# Altium PCB EIS_Sensoren.PcbDoc
Units mil, origin at the board's own origin, x right, y up, seen from the top; angles counter-clockwise.
Board outline 3444.88 x 1496.06 mil, 2 copper layers (Top Layer, Bottom Layer); 43 components, 23 nets, 172 pads, 18 vias.
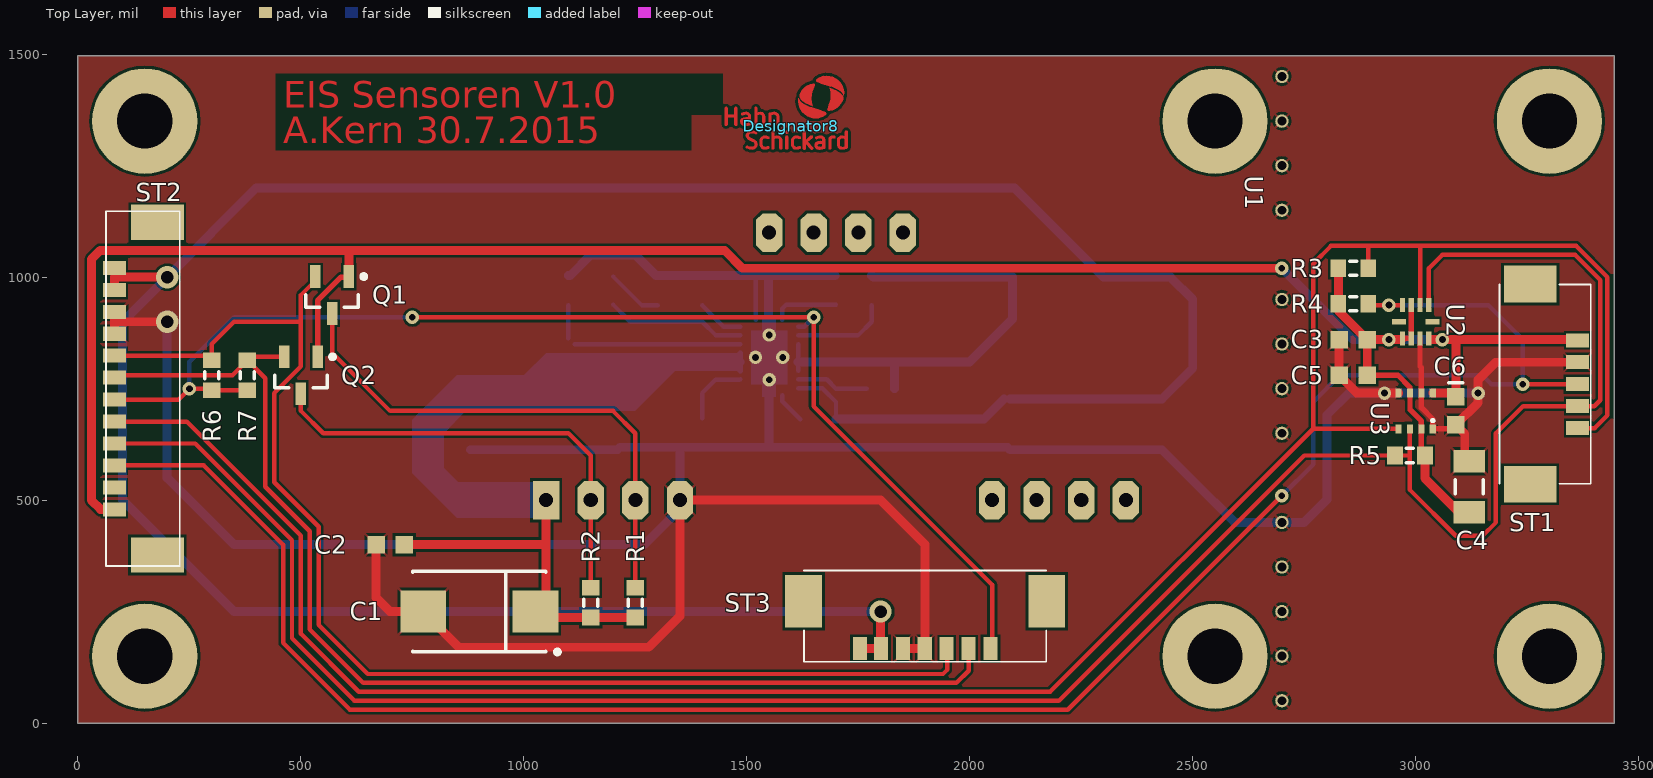
[diagram p0: Top Layer view]
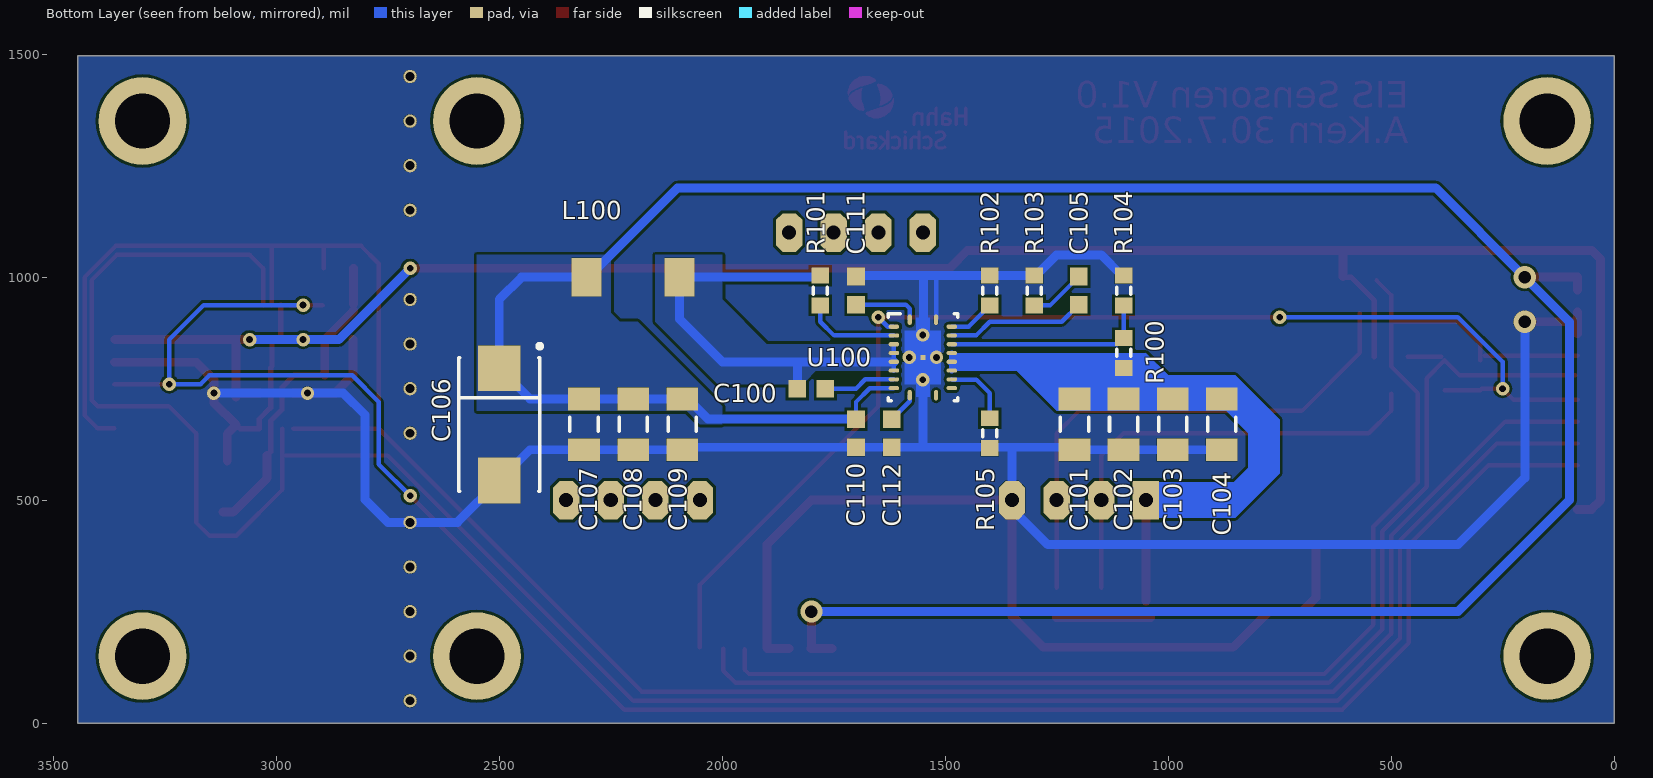
[diagram p1: Bottom Layer view, seen from below]

## Layer stack, top to bottom
Top Solder: solder mask 0.4, Solder Resist, Dk 3.5
Top Layer: signal copper 1.4
Dielectric 1: dielectric 12.6, FR-4, Dk 4.8
Bottom Layer: signal copper 1.4
Bottom Solder: solder mask 0.4, Solder Resist, Dk 3.5

## Board outline
0,0 0,1496.06 3444.88,1496.06 3444.88,0 0,0

## Design rules (kind name [scope] priority, off if disabled: settings)
Clearance Via-Trace [(IsVia) vs (IsTrack)or(isVia)] p1: gap=5.91
Clearance Via-Pad [(IsVia) vs (InPadClass('All Pads'))] p2: gap=5.91
Clearance Pad-Trace [(InPadClass('All Pads')) vs IsTrack] p3: gap=5.91
Clearance Trace-Trace [IsTrack vs IsTrack] p4: gap=5.91
Clearance [All] p5: gap=5.91
ComponentClearance [All] p1: gap=15.75 collisioncheckmode=3 verticalgap=15.75 showdistances=FALSE
DiffPairsRouting [All] p1: maxlimit=39.37 minlimit=5.91 mostfreqgap=7.87 toplayer_minwidth=5.91 toplayer_maxwidth=39.37 toplayer_prefwidth=7.87 bottomlayer_minwidth=5.91 bottomlayer_maxwidth=39.37 bottomlayer_prefwidth=7.87 maxuncoupledlength=500
FabricationTestPointUsage TestPointUsage [All] p1: valid=0 allowmultiple=FALSE
FabricationTestpoint Testpoint [(IsPad And (OnTopLayer Or OnBottomLayer))] p1: side=3 testpointundercomponent=TRUE minsize=31.5 maxsize=47.24 preferedsize=39.37 minholesize=0 maxholesize=0 preferedholesize=0 testpointgrid=3.94 allowsidetop=TRUE allowsidebottom=TRUE usegrid=TRUE gridtolerance=0.01
Height [All] p1: minheight=0 maxheight=610.24 prefheight=393.7
HoleSize [All] p1: absolutevalues=TRUE maxlimit=220 minlimit=12 maxpercent=80.000 minpercent=20.000
MinimumSolderMaskSliver [All] p1: minsoldermaskwidth=7
PlaneClearance [All] p1: clearance=5.91
PlaneConnect [All] p1: planeconnectstyle=Relief reliefexpansion=19.68 reliefentries=4 reliefconductorwidth=19.68 reliefairgap=7.87
PolygonConnect PolygonConnect_1 [All vs OnLayer('Bottom Layer')] p1: connectstyle=Relief reliefconductorwidth=0 reliefentries=4 polygonreliefangle="90 Angle" airgapwidth=0
PolygonConnect VIA [All vs ISVIA] p2: connectstyle=Direct reliefconductorwidth=10 reliefentries=4 polygonreliefangle="90 Angle" airgapwidth=10
PolygonConnect [All] p3: connectstyle=Relief reliefconductorwidth=5.91 reliefentries=4 polygonreliefangle="45 Angle" airgapwidth=5.91
RoutingCorners [All] p1: cornerstyle=45-Degree minsetback=19.68 maxsetback=39.37
RoutingVias [All] p1: holewidth=12 width=24 viastyle="Through Hole" minholewidth=12 minwidth=24 maxholewidth=16 maxwidth=40
SilkToSolderMaskClearance SilkscreenOverComponentPads [IsPad] p1: minsilkscreentomaskgap=10 clearancetoexposedcopper=TRUE
SolderMaskExpansion [All] p1: expansion=0
Width Width_VCC [(InNet('6V') OR InNet('A3V') OR InNet('UBAT'))] p1: maxlimit=50 minlimit=10 preferedwidth=20
Width Width_GND [(InNet('AGND') OR InNet('GND'))] p2: maxlimit=50 minlimit=10 preferedwidth=20
Width [All] p3: maxlimit=20 minlimit=6 preferedwidth=10
19 further rules are at their usual default settings.

## Classes and differential pairs
component class EIS_Sensoren: C1 C2 C3 C4 C6 Q1 Q2 R1 R2 R3 R4 R5 R6 R7 ST1 ST2 ST3 U1 U2 U3
component class Designator: C100 C101 C102 C103 C104 C105 C106 C107 C108 C109 C110 C111 C112 L100 R100 R101 R102 R103 R104 R105 U100

## Components (designator, comment, footprint, x,y, rotation, side; value= is the part's Value field where it differs from the comment)
C1 "220uF / 10V" D 900,250 r180 top
C2 "100nF" CAPC1608N 700,400 r180 top
C3 "100nF" CAPC1608N 2860,860 r180 top
C4 "1uF" CAPC3216N 3120,530 r90 top
C5 "100nF" CAPC1608N 2860,780 r180 top
C6 "100nF" CAPC1608N 3090,700 r270 top
C100 "100nF" CAPC1608N 1800,750 r180 bottom
C101 "1uF" CAPC3216N 1210,670 r270 bottom
C102 "10uF" CAPC3216N 1100,670 r270 bottom
C103 "10uF" CAPC3216N 990,670 r270 bottom
C104 "10uF" CAPC3216N 880,670 r270 bottom
C105 "10nF" CAPC1608N 1200,970 r270 bottom
C106 "220uF / 10V" D 2500,670 r270 bottom
C107 "10uF" CAPC3216N 2310,670 r270 bottom
C108 "10uF" CAPC3216N 2200,670 r270 bottom
C109 "10uF" CAPC3216N 2090,670 r270 bottom
C110 "100nF" CAPC1608N 1700,650 r90 bottom
C111 "100nF" CAPC1608N 1700,970 r270 bottom
C112 "47nF" CAPC1608N 1620,650 r90 bottom
Designator8 "Comment" Hahn-Schickard-LOGO_KLEIN 1600,1340 r0 top
L100 "CLF6045T-2R2N" CLF6045 2200,1000 r180 bottom
Q1 "BSS123" SOT23_N 570,960 r270 top
Q2 "BSS123" SOT23_N 500,780 r270 top
R1 "100k" RESC1608N 1250,270 r270 top
R2 "100k" RESC1608N 1150,270 r270 top
R3 "4,7k" RESC1608N 2860,1020 r180 top
R4 "4,7k" RESC1608N 2860,940 r180 top
R5 "4,7k" RESC1608N 2987.2,600 r0 top
R6 "100k" RESC1608N 300,780 r90 top
R7 "100k" RESC1608N 380,780 r90 top
R100 "3.9meg" RESC1608N 1100,830 r90 bottom
R101 "150k" RESC1608N 1780,970 r90 bottom
R102 "330k" RESC1608N 1400,970 r90 bottom
R103 "3.9k" RESC1608N 1300,970 r90 bottom
R104 "100k" RESC1608N 1100,970 r90 bottom
R105 "nc" RESC1608N 1400,650 r270 bottom
ST1 "Molex 533980571" "Molex 533980571" 3310,760 r90 top
ST2 "Molex 533981271" "Molex 533981271" 130,750 r270 top
ST3 "Molex 533980771" "Molex 533980771" 1900,220 r0 top
U1 "EE893-02C2" EE893 1700,800 r0 top
U2 "Si1132" Si1132 3000,900 r270 top
U3 "BME280" BME280 3000,700 r270 top
U100 "TPS61088" RHL0020A 1550,820 r180 bottom

## Footprints (in the part's own frame and the unit in brackets; to place one, negate y for a bottom-side part, rotate by r counter-clockwise, add the part's x,y. Pads: shape width x height; smd on the part's side, far side on the other; paste and mask are expansions set on the pad)
BME280 [mm] "8 pin Druck/Feuchte/Temp"
  rect 0.5x0.35 smd: 1(1.025,0.975) 2(1.025,0.325) 3(1.025,-0.325) 4(1.025,-0.975) 5(-1.025,-0.975) 6(-1.025,-0.325) 7(-1.025,0.325) 8(-1.025,0.975)
  silkscreen extent 0.53,0.95 0.57,1, body extent -1.25,-1.25 1.25,1.25, height 0.94
CAPC1608N [mm] "Chip Capacitor, Body 1.6x0.8mm, IPC Medium Density"
  rect 1x1 smd: 1(-0.8,0) 2(0.8,0)
  body extent -0.87,-0.48 0.87,0.48, height 0.85
CAPC3216N [mm] "Chip Capacitor, Body 3.2x1.6mm, IPC Medium Density"
  rect 1.3x1.8 smd: 1(-1.45,0) 2(1.45,0)
  silkscreen extent -0.4,-0.8 0.4,0.8, body extent -1.7,-0.9 1.7,0.9, height 1.35
CLF6045 [mm] "TDK-Spule, 5.9x6.2x4.5mm geschirmt"
  rect 1.7x2.2 smd: 1(-2.65,0) 2(2.65,0)
  body extent -3,-3 3,3, height 4.5
D [mm] "Capacitor, SM Tantalum; Body 7.3 x 4.3 mm (LxW typ)"
  rect 2.6x2.4 smd: 1(-3.2,0) 2(3.2,0)
  silkscreen extent -4.58,-2.3 3.8,2.42
EE893 [mm] "CO2-Sensor 22x45x15.3mm"
  rect 1.5x2.2 hole 0.8: 1(-16.51,-7.62)
  oct 1.5x2.2 hole 0.8: 2(-13.97,-7.62) 3(-11.43,-7.62) 4(-8.89,-7.62) 5(8.89,-7.62) 6(11.43,-7.62) 7(13.97,-7.62) 8(16.51,-7.62) 9(3.81,7.62) 10(1.27,7.62) 11(-1.27,7.62) 12(-3.81,7.62)
  body extent -27.35,-10.9 22.55,11.1, height 15.25
Hahn-Schickard-LOGO_KLEIN [mil]
  Top Layer region: 25.83,54.25 32.18,50.1 39.73,46.44 47.59,43.48 45.3,52.73 45.29,52.75 45.29,52.77 45.29,52.77 44.69,61.49 44.69,61.52 44.69,61.54 44.69,61.54 45.43,69.25 45.43,69.26 45.43,69.28 45.43,69.28 45.43,69.28 47.02,75.97 47.02,75.97 47.02,75.97 47.02,75.97 47.03,75.98 47.03,75.99 47.03,75.99 47.03,76 49.08,81.9 49.08,81.9 49.08,81.91 49.08,81.91 49.09,81.91 49.09,81.91 49.09,81.91 49.09,81.92 50.99,86.69 52.18,90.31 52.32,91.35 52.27,92.2 52.01,92.88 51.51,93.41 50.71,93.81 49.56,94.06 48.31,94.1 47.33,94 47.34,94 47.34,94.01 47.34,94.01 47.33,94 34.79,89.46 24.7,80.73 18.39,68.99 18.39,68.99 18.24,65.02 19.54,61.24 22.13,57.64
  Top Layer region: 45.42,40.64 52.38,38.46 52.38,38.46 52.38,38.46 52.38,38.46 59.91,36.2 59.92,36.19 59.92,36.19 59.92,36.19 59.92,36.19 59.92,36.19 59.92,36.19 59.92,36.19 59.91,36.2 59.92,36.19 66.25,34.2 66.25,34.2 66.26,34.19 66.26,34.19 66.25,34.2 66.26,34.19 66.26,34.19 66.26,34.19 71.33,32.38 71.34,32.38 71.35,32.38 71.35,32.38 74.28,31.1 74.29,31.09 74.31,31.08 74.31,31.08 76.46,29.82 76.48,29.81 76.5,29.8 76.5,29.8 77.5,28.96 77.52,28.94 77.54,28.91 77.54,28.91 77.54,28.92 77.54,28.91 77.54,28.91 77.54,28.91 78.17,28.06 78.17,28.05 78.18,28.05 78.18,28.05 78.17,28.05 78.2,28.02 78.22,27.97 78.22,27.97 78.48,27.09 78.49,27.05 78.49,27.01 78.49,27.01 78.49,27 78.49,26.99 78.49,26.99 78.41,26.18 78.41,26.2 78.41,26.21 78.41,26.21 78.41,26.18 78.4,26.14 78.39,26.1 78.39,26.1 78.01,25.26 77.99,25.23 77.97,25.2 77.97,25.2 77.05,24.07 77.04,24.05 77.02,24.03 77.02,24.03 77.02,24.04 77.02,24.03 77.02,24.03 77.02,24.03 75.6,22.82 75.6,22.82 75.58,22.81 75.56,22.8 75.56,22.8 75.56,22.79 75.58,22.81 75.59,22.82 75.59,22.82 75.6,22.82 75.6,22.82 75.6,22.82 75.6,22.82 75.59,22.82 75.56,22.8 75.56,22.79 75.56,22.79 75.56,22.79 69.79,19.34 69.78,19.34 69.78,19.33 69.78,19.34 69.79,19.34 69.79,19.34 69.78,19.34 69.76,19.32 69.73,19.31 69.73,19.31 61.33,16.69 61.32,16.69 61.32,16.68 61.32,16.69 61.33,16.69 61.33,16.69 61.32,16.68 61.3,16.68 61.29,16.68 61.29,16.68 41.29,18.36 24.74,29.73 16,47.8 16,47.8 16,47.8 16,47.81 16,47.81 16,47.81 16,47.82 16,47.83 15.34,53.75 15.34,53.78 15.34,53.8 15.34,53.8 15.34,53.81 15.82,61.27 15.82,61.27 15.87,61.4 15.97,61.49 16.11,61.52 16.24,61.48 16.33,61.37 16.33,61.37 16.33,61.37 16.33,61.37 17.93,58.02 21.27,53.9 30.21,47.13 40.41,42.49 40.41,42.49 40.41,42.48 40.41,42.48 40.41,42.48 40.42,42.48 40.42,42.48 40.42,42.48
  Top Layer region: 81.93,34.07 81.96,34.04 82,34.02 82,34.02 82.87,33.58 82.9,33.57 82.93,33.56 82.93,33.56 82.94,33.56 84.13,33.29 84.14,33.29 84.16,33.29 84.19,33.29 84.18,33.29 84.19,33.29 84.19,33.29 84.19,33.29 84.19,33.29 84.16,33.29 84.14,33.29 84.14,33.29 84.14,33.29 84.13,33.29 84.13,33.29 84.14,33.29 84.14,33.29 84.19,33.29 85.48,33.25 85.48,33.25 85.49,33.25 85.49,33.25 85.48,33.25 85.5,33.25 85.51,33.25 85.51,33.25 86.51,33.34 86.52,33.35 86.53,33.35 86.53,33.35 99.27,37.97 109.51,46.83 115.92,58.77 115.92,58.77 115.92,58.77 115.93,58.8 115.93,58.84 115.93,58.84 115.93,58.84 115.93,58.84 115.93,58.84 116.08,62.89 116.08,62.89 116.08,62.9 116.08,62.9 116.08,62.9 116.08,62.95 116.07,62.99 116.07,62.99 114.74,66.85 114.72,66.89 114.7,66.92 114.7,66.92 112.08,70.57 112.06,70.59 112.04,70.61 112.04,70.61 108.31,74.03 108.29,74.05 108.27,74.06 108.27,74.06 108.27,74.06 101.89,78.23 101.89,78.23 101.89,78.23 101.89,78.23 101.88,78.24 101.86,78.24 101.86,78.24 101.86,78.24 101.88,78.24 101.89,78.23 101.89,78.23 101.89,78.23 101.86,78.24 101.86,78.24 101.86,78.24 101.86,78.24 94.28,81.92 94.28,81.92 94.28,81.92 94.28,81.92 94.28,81.92 94.28,81.92 94.27,81.93 94.26,81.93 94.26,81.93 85.91,85.07 85.8,85.09 85.69,85.06 85.6,84.98 85.56,84.88 85.56,84.76 85.56,84.76 87.97,75.05 88.57,66.37 87.84,58.7 86.26,52.05 84.21,46.15 82.31,41.38 82.31,41.38 82.31,41.38 82.31,41.38 82.31,41.38 82.31,41.38 82.3,41.37 82.3,41.36 82.3,41.36 81.1,37.71 81.1,37.69 81.09,37.67 81.09,37.67 81.09,37.67 80.94,36.58 80.94,36.58 80.93,36.55 80.93,36.52 80.93,36.52 80.93,36.52 80.99,35.6 80.99,35.6 80.99,35.6 80.99,35.6 81,35.56 81.01,35.52 81.01,35.52 81.01,35.52 81.01,35.52 81.01,35.51 81.01,35.51 81.3,34.76 81.31,34.76 81.31,34.75 81.31,34.75 81.31,34.76 81.33,34.71 81.36,34.67 81.36,34.67 81.36,34.67 81.36,34.67
  Top Layer region: 93.4,85.76 103.66,81.08 112.66,74.28 112.66,74.28 112.66,74.28 116.03,70.11 117.65,66.74 118.13,74.21 117.47,80.14 117.47,80.14 108.79,98.09 92.36,109.38 72.49,111.05 72.49,111.05 72.49,111.05 88.4,87.61
  Top Layer region: 55.56,99.94 55.53,99.98 55.52,100.02 55.52,100.02 55.25,100.9 55.24,100.95 55.24,101 55.24,101 55.32,101.81 55.33,101.85 55.35,101.89 55.35,101.89 55.72,102.73 55.74,102.76 55.76,102.79 55.76,102.79 56.68,103.92 56.7,103.94 56.71,103.96 56.72,103.96 56.72,103.96 58.14,105.17 58.14,105.17 58.14,105.17 58.14,105.17 58.16,105.19 58.17,105.2 58.17,105.2 58.18,105.2 63.95,108.66 63.95,108.66 63.95,108.66 63.95,108.66 63.95,108.66 63.98,108.67 64.01,108.68 64.01,108.68 72.41,111.31 72.53,111.31 72.65,111.27 72.72,111.17 72.75,111.05 72.75,111.05 72.75,111.05 72.75,111.04 72.75,111.04 88.48,87.86 88.58,87.8 88.64,87.71 88.66,87.61 88.66,87.61 88.63,87.49 88.56,87.39 88.44,87.34 88.32,87.35 88.32,87.35 81.35,89.53 81.35,89.53 81.35,89.53 81.35,89.53 73.82,91.8 73.82,91.8 73.81,91.8 73.81,91.8 73.81,91.8 67.48,93.79 67.48,93.8 67.48,93.8 67.48,93.79 67.48,93.79 67.48,93.8 67.47,93.8 67.47,93.8 67.47,93.8 62.4,95.61 62.39,95.61 62.39,95.61 62.39,95.61 59.45,96.9 59.44,96.9 59.43,96.91 59.43,96.91 57.27,98.17 57.25,98.18 57.23,98.19 57.23,98.19 56.23,99.03 56.21,99.06 56.19,99.08 56.19,99.08 56.19,99.08 56.19,99.08 56.19,99.08 56.19,99.08
  Top Layer region: 108.46,-42.33 108.46,-34.04 108.76,-31.74 110.02,-29.79 111.98,-28.56 114.28,-28.28 114.28,-28.28 114.28,-28.28 117.02,-28.7 116.45,-23.03 113.69,-22.7 109.18,-23.43 105.39,-25.98 102.98,-29.86 102.41,-34.4 102.41,-34.4 102.41,-41.98 102.41,-41.98 103.07,-46.64 105.64,-50.58 109.62,-53.08 114.28,-53.68 114.28,-53.68 114.28,-53.68 119.63,-53.19 117.61,-47.89 114.28,-48.15 111.98,-47.84 110.02,-46.59 108.77,-44.64 108.46,-42.33
  Top Layer region: 25.76,-50.68 25.99,-51.95 26.72,-53.03 27.81,-53.73 29.09,-53.95 29.09,-53.95 30.33,-53.72 31.39,-53.02 32.1,-51.98 32.35,-50.74 32.35,-50.74 32.35,-50.71 32.34,-50.68 32.34,-50.68 32.34,-50.68 32.34,-50.68 32.34,-50.68 32.34,-50.68 32.34,-40.68 43.05,-52.8 44.17,-53.65 45.54,-53.95 45.54,-53.95 45.55,-53.95 45.55,-53.95 45.55,-53.95 45.54,-53.95 46.77,-53.72 47.81,-53.04 48.5,-52.01 48.75,-50.79 48.75,-50.79 48.75,-50.77 48.75,-50.74 48.75,-50.74 48.75,-50.74 48.75,-50.72 48.74,-50.7 48.74,-50.7 48.74,-50.69 48.54,-49.55 48.52,-49.5 48.5,-49.46 48.5,-49.46 47.94,-48.6 47.93,-48.58 47.92,-48.56 47.92,-48.56 36.87,-36.6 47.13,-28.02 47.97,-26.96 48.28,-25.64 48.28,-25.64 48.28,-25.64 48.28,-25.64 48.28,-25.64 48.28,-25.64 48.28,-25.61 48.28,-25.58 48.28,-25.58 48.03,-24.36 47.34,-23.33 46.29,-22.65 45.07,-22.43 45.07,-22.43 45.07,-22.43 45.05,-22.43 45.02,-22.44 45.02,-22.44 45.02,-22.44 45.01,-22.44 45.01,-22.44 45.02,-22.44 45.02,-22.44 45.01,-22.44 43.78,-22.71 43.78,-22.71 43.77,-22.71 43.77,-22.71 43.78,-22.71 43.73,-22.73 43.69,-22.75 43.69,-22.75 42.76,-23.35 42.74,-23.37 42.72,-23.38 42.72,-23.38 42.73,-23.38 42.72,-23.38 42.72,-23.38 42.72,-23.38 32.34,-32.46 32.34,-14.29 32.35,-14.25 32.35,-14.21 32.35,-14.21 32.1,-12.97 31.39,-11.93 30.33,-11.24 29.08,-11.02 29.08,-11.02 29.09,-11.02 29.1,-11.02 29.09,-11.02 29.08,-11.02 29.08,-11.02 29.07,-11.02 29.07,-11.02 29.08,-11.02 27.8,-11.23 26.71,-11.93 25.99,-13.01 25.76,-14.29 25.76,-14.29 25.76,-14.29 25.76,-14.29 25.76,-14.29 25.76,-14.29
  Top Layer region: 11.09,-48.15 8.73,-47.71 6.78,-46.33 5.59,-44.25 5.38,-41.86 5.38,-41.86 5.38,-41.86 5.38,-34.51 5.6,-32.14 6.8,-30.08 8.74,-28.71 11.09,-28.28 11.09,-28.28 11.09,-28.28 13.83,-28.57 15.56,-29.1 17.17,-29.81 18.5,-30.05 18.5,-30.05 19.55,-29.85 20.45,-29.25 21.03,-28.34 21.2,-27.28 21.2,-27.28 21.2,-27.28 21.01,-26.27 20.48,-25.39 19.67,-24.75 19.67,-24.75 15.18,-23.12 11.2,-22.7 11.2,-22.7 6.55,-23.37 2.59,-25.91 0.03,-29.86 -0.67,-34.51 -0.67,-34.51 -0.67,-34.51 -0.67,-41.86 0.05,-46.5 2.61,-50.44 6.56,-52.98 11.2,-53.68 11.2,-53.68 16.22,-53.01 19.67,-51.68 20.48,-51.04 21.01,-50.16 21.2,-49.15 21.2,-49.15 21,-48.07 20.39,-47.16 19.47,-46.57 18.38,-46.39 18.38,-46.39 18.38,-46.39 16.82,-46.71 15.62,-47.21 13.32,-47.94
  Top Layer region: -13.49,-50.68 -13.27,-51.85 -12.61,-52.84 -11.61,-53.49 -10.43,-53.68 -10.43,-53.68 -10.43,-53.68 -9.27,-53.48 -8.28,-52.84 -7.63,-51.85 -7.43,-50.68 -7.43,-50.68 -7.43,-25.69 -7.43,-25.69 -7.63,-24.53 -8.28,-23.54 -9.27,-22.89 -10.43,-22.7 -10.43,-22.7 -11.61,-22.89 -12.61,-23.53 -13.27,-24.52 -13.49,-25.69 -13.49,-25.69
  Top Layer region: -13.96,-14.82 -13.63,-16.36 -12.65,-17.61 -11.22,-18.3 -9.64,-18.3 -8.22,-17.61 -7.24,-16.36 -6.9,-14.82 -6.9,-14.82 -6.9,-14.82 -7.38,-13.05 -8.67,-11.76 -10.43,-11.29 -12.19,-11.76 -13.49,-13.05 -13.96,-14.82
  Top Layer region: -44.42,-50.68 -44.2,-51.85 -43.54,-52.84 -42.54,-53.49 -41.36,-53.68 -41.36,-53.68 -41.36,-53.68 -40.2,-53.48 -39.22,-52.83 -38.57,-51.84 -38.36,-50.68 -38.36,-50.68 -38.36,-30.34 -35.16,-28.67 -32.48,-28.28 -30.21,-28.58 -28.28,-29.83 -27.06,-31.77 -26.78,-34.04 -26.78,-34.04 -26.78,-50.68 -26.78,-50.68 -26.56,-51.85 -25.9,-52.84 -24.9,-53.49 -23.72,-53.68 -23.72,-53.68 -22.56,-53.48 -21.58,-52.83 -20.93,-51.84 -20.72,-50.68 -20.72,-50.68 -20.72,-34.4 -21.2,-29.88 -23.53,-25.98 -27.29,-23.43 -31.78,-22.7 -31.78,-22.7 -31.78,-22.7 -35.49,-23.26 -38.36,-24.4 -38.36,-14.29 -38.57,-13.13 -39.22,-12.14 -40.2,-11.5 -41.36,-11.29 -41.36,-11.29 -41.36,-11.29 -42.54,-11.48 -43.54,-12.13 -44.2,-13.12 -44.42,-14.29 -44.42,-14.29 -44.42,-14.29
  Top Layer region: -59.36,-48.15 -61.71,-47.71 -63.66,-46.33 -64.85,-44.25 -65.06,-41.86 -65.06,-41.86 -65.06,-34.51 -64.84,-32.14 -63.65,-30.08 -61.7,-28.71 -59.36,-28.28 -59.36,-28.28 -59.36,-28.28 -56.61,-28.57 -54.89,-29.1 -53.28,-29.81 -51.95,-30.05 -51.95,-30.05 -50.89,-29.85 -50,-29.25 -49.42,-28.34 -49.24,-27.28 -49.24,-27.28 -49.43,-26.27 -49.96,-25.39 -50.77,-24.75 -50.77,-24.75 -50.77,-24.75 -55.26,-23.12 -59.24,-22.7 -59.24,-22.7 -63.89,-23.37 -67.85,-25.91 -70.41,-29.86 -71.11,-34.51 -71.11,-34.51 -71.11,-41.86 -71.11,-41.86 -70.39,-46.5 -67.83,-50.44 -63.88,-52.98 -59.24,-53.68 -59.24,-53.68 -54.22,-53.01 -50.77,-51.68 -49.97,-51.04 -49.43,-50.16 -49.24,-49.15 -49.24,-49.15 -49.44,-48.07 -50.05,-47.16 -50.98,-46.57 -52.06,-46.39 -52.06,-46.39 -52.06,-46.39 -53.62,-46.71 -54.83,-47.21 -57.12,-47.94
  Top Layer region: -100.28,-51.39 -94.53,-53.22 -89.34,-53.68 -89.34,-53.68 -84.43,-53.25 -80.1,-50.87 -77.1,-46.95 -75.94,-42.16 -75.94,-42.16 -77,-37.34 -79.91,-33.36 -84.17,-30.87 -84.17,-30.87 -91.05,-27.69 -91.05,-27.69 -93.47,-26.58 -95.21,-24.56 -95.93,-21.99 -95.93,-21.99 -95.93,-21.99 -94.76,-19.23 -92.37,-17.43 -89.4,-17.05 -89.4,-17.05 -89.4,-17.05 -85.35,-17.43 -82.35,-18.4 -80.88,-18.95 -79.76,-19.11 -79.76,-19.11 -78.7,-18.88 -77.81,-18.27 -77.23,-17.35 -77.05,-16.29 -77.05,-16.29 -77.05,-16.29 -77.24,-15.13 -77.86,-14.14 -78.82,-13.46 -78.82,-13.46 -78.82,-13.46 -84.08,-11.72 -89.05,-11.29 -93.78,-11.66 -97.97,-13.9 -100.91,-17.63 -102.1,-22.23 -102.1,-22.23 -102.1,-22.23 -101.13,-26.63 -98.52,-30.31 -94.69,-32.69 -94.69,-32.69 -87.52,-36.04 -87.52,-36.04 -84.87,-37.29 -82.98,-39.52 -82.17,-42.33 -82.17,-42.33 -82.17,-42.33 -82.89,-44.77 -84.53,-46.71 -86.81,-47.82 -89.34,-47.92 -89.34,-47.92 -89.34,-47.92 -93.82,-47.35 -96.69,-46.33 -98.33,-45.74 -99.34,-45.63 -100.45,-45.84 -101.39,-46.48 -101.99,-47.44 -102.16,-48.57 -102.16,-48.57 -102.16,-48.57 -101.94,-49.74 -101.28,-50.73 -100.28,-51.39
  Top Layer region: -50.88,2.45 -50.88,25.44 -50.88,25.44 -50.56,26.96 -49.62,28.2 -48.24,28.91 -48.24,28.91 -48.24,28.91 -44.33,29.93 -39.06,30.44 -34.39,29.92 -30.39,27.46 -27.82,23.52 -27.19,18.86 -27.19,18.86 -27.19,2.45 -27.39,1.29 -28.04,0.31 -29.03,-0.34 -30.19,-0.55 -30.19,-0.55 -31.36,-0.35 -32.36,0.29 -33.03,1.28 -33.25,2.45 -33.25,2.45 -33.25,2.45 -33.25,19.09 -33.25,19.09 -33.55,21.39 -34.81,23.33 -36.77,24.57 -39.06,24.85 -39.06,24.85 -39.06,24.85 -41.66,24.69 -44.83,24.03 -44.83,2.45 -44.83,2.45 -45.03,1.29 -45.68,0.31 -46.66,-0.34 -47.82,-0.55 -47.82,-0.55 -49,-0.35 -50,0.29 -50.67,1.28 -50.88,2.45
  Top Layer region: -82.75,2.45 -82.54,1.28 -81.87,0.29 -80.87,-0.35 -79.69,-0.55 -79.69,-0.55 -79.69,-0.55 -78.53,-0.34 -77.55,0.31 -76.9,1.29 -76.7,2.45 -76.7,2.45 -76.7,2.45 -76.7,22.8 -73.49,24.47 -70.82,24.85 -68.54,24.55 -66.61,23.31 -65.39,21.37 -65.11,19.09 -65.11,19.09 -65.11,2.45 -64.9,1.28 -64.23,0.29 -63.23,-0.35 -62.05,-0.55 -62.05,-0.55 -60.89,-0.34 -59.91,0.31 -59.26,1.29 -59.06,2.45 -59.06,2.45 -59.06,2.45 -59.06,18.74 -59.06,18.74 -59.53,23.26 -61.87,27.16 -65.63,29.71 -70.11,30.44 -70.11,30.44 -73.82,29.87 -76.7,28.74 -76.7,38.85 -76.9,40.01 -77.55,40.99 -78.53,41.64 -79.69,41.85 -79.69,41.85 -80.87,41.65 -81.87,41.01 -82.54,40.02 -82.75,38.85 -82.75,38.85 -82.75,38.85
  Top Layer region: -149.43,2.51 -149.2,1.32 -148.52,0.32 -147.51,-0.34 -146.32,-0.55 -146.32,-0.55 -146.32,-0.55 -145.14,-0.33 -144.14,0.33 -143.48,1.33 -143.26,2.51 -143.26,2.51 -143.26,18.5 -127.73,18.5 -127.73,2.51 -127.5,1.32 -126.83,0.32 -125.81,-0.34 -124.62,-0.55 -124.62,-0.55 -123.44,-0.33 -122.44,0.34 -121.78,1.33 -121.56,2.51 -121.56,2.51 -121.56,38.85 -121.56,38.85 -121.8,40.01 -122.46,40.99 -123.45,41.64 -124.62,41.85 -124.62,41.85 -125.8,41.65 -126.81,41.01 -127.49,40.02 -127.73,38.85 -127.73,38.85 -127.73,24.44 -143.26,24.44 -143.26,38.85 -143.26,38.85 -143.49,40.01 -144.16,40.99 -145.15,41.64 -146.32,41.85 -146.32,41.85 -147.5,41.65 -148.51,41.01 -149.19,40.02 -149.43,38.85 -149.43,38.85
  Top Layer region: -109.92,22.91 -108.43,23.24 -107.21,23.8 -104.49,24.67 -102.04,24.85 -102.04,24.85 -100.19,24.77 -98.54,23.95 -97.36,22.52 -96.87,20.74 -96.87,20.74 -96.87,20.74 -96.87,18.39 -102.21,18.39 -102.39,12.8 -96.87,12.8 -96.87,5.69 -99.2,5.2 -102.28,4.98 -102.21,-0.55 -96.78,-0.05 -93.16,0.87 -93.16,0.87 -91.92,1.59 -91.09,2.75 -90.81,4.16 -90.81,4.16 -90.81,4.16 -90.81,20.8 -91.85,24.85 -94.43,28.14 -98.11,30.11 -102.28,30.44 -102.28,30.44 -106.95,29.88 -111.33,28.15 -111.33,28.15 -111.33,28.15 -112.35,27.13 -112.74,25.74 -112.74,25.74 -112.74,25.74 -112.35,24.33 -111.32,23.3 -109.92,22.91
  Top Layer region: -114.77,8.96 -114.77,8.99 -114.77,9.01 -114.77,9.01 -114.42,11.75 -114.41,11.78 -114.4,11.82 -114.4,11.82 -113.42,14.04 -113.4,14.07 -113.37,14.11 -113.37,14.11 -113.37,14.11 -111.84,15.84 -111.84,15.84 -111.8,15.87 -111.76,15.9 -111.76,15.9 -111.76,15.9 -107.61,17.98 -107.6,17.98 -107.56,18 -107.52,18.01 -107.52,18.01 -107.51,18.01 -102.25,18.65 -102.14,18.64 -102.04,18.58 -101.97,18.5 -101.95,18.39 -101.95,18.39 -101.96,18.3 -102.01,18.22 -102.01,18.22 -102.17,12.95 -102.14,12.88 -102.13,12.8 -102.13,12.8 -102.16,12.67 -102.25,12.58 -102.37,12.54 -102.37,12.54 -104.82,12.35 -106.66,11.72 -107.31,11.24 -107.78,10.61 -108.08,9.83 -108.18,8.86 -108.08,7.86 -107.78,7.07 -107.3,6.46 -106.65,5.99 -104.78,5.41 -102.26,5.24 -102.13,5.2 -102.04,5.11 -102.01,4.98 -102.01,4.98 -102.02,4.9 -102.06,4.82 -102.06,4.82 -102,-0.38 -101.96,-0.46 -101.95,-0.55 -101.95,-0.55 -101.98,-0.66 -102.05,-0.76 -102.16,-0.81 -102.16,-0.81 -106.65,-0.74 -110.7,1.2 -113.58,4.64 -114.77,8.96
  Top Layer region: 56.66,-30.22 58.15,-29.9 59.36,-29.34 62.08,-28.47 64.57,-28.28 66.41,-28.37 68.06,-29.2 69.22,-30.62 69.71,-32.4 69.71,-32.4 69.71,-34.75 64.36,-34.75 64.18,-40.33 69.71,-40.33 69.71,-47.45 67.37,-47.93 64.3,-48.15 64.36,-53.68 69.8,-53.19 73.42,-52.27 74.65,-51.55 75.49,-50.38 75.77,-48.98 75.77,-48.98 75.77,-32.34 74.73,-28.29 72.15,-25 68.47,-23.02 64.3,-22.7 64.3,-22.7 59.63,-23.26 55.25,-24.99 55.25,-24.99 54.22,-26.01 53.84,-27.4 53.84,-27.4 54.22,-28.8 55.25,-29.83 56.66,-30.22
  Top Layer region: 51.81,-44.17 51.81,-44.15 51.81,-44.12 51.81,-44.12 52.16,-41.39 52.16,-41.35 52.18,-41.32 52.18,-41.32 52.18,-41.31 53.16,-39.1 53.16,-39.1 53.18,-39.06 53.2,-39.03 53.2,-39.03 53.2,-39.03 53.21,-39.03 53.21,-39.03 54.74,-37.3 54.74,-37.3 54.74,-37.29 54.74,-37.29 54.78,-37.26 54.82,-37.23 54.82,-37.23 54.82,-37.23 58.97,-35.16 58.97,-35.16 58.98,-35.15 58.98,-35.15 59.02,-35.14 59.06,-35.13 59.06,-35.13 59.06,-35.13 64.33,-34.49 64.44,-34.5 64.54,-34.55 64.6,-34.64 64.63,-34.75 64.63,-34.75 64.61,-34.84 64.57,-34.91 64.57,-34.91 64.4,-40.18 64.44,-40.25 64.45,-40.33 64.45,-40.33 64.42,-40.46 64.33,-40.56 64.2,-40.6 64.2,-40.6 61.76,-40.79 59.92,-41.42 59.27,-41.9 58.8,-42.52 58.5,-43.31 58.4,-44.27 58.5,-45.27 58.8,-46.06 59.28,-46.68 59.93,-47.14 61.8,-47.72 64.32,-47.89 64.44,-47.93 64.53,-48.03 64.57,-48.15 64.57,-48.15 64.55,-48.24 64.52,-48.31 64.52,-48.31 64.57,-53.52 64.61,-53.6 64.63,-53.68 64.63,-53.68 64.6,-53.8 64.52,-53.89 64.41,-53.94 64.41,-53.94 64.41,-53.94 59.93,-53.87 55.88,-51.94 53,-48.5 51.81,-44.17
  Top Layer region: 83.24,-50.68 83.45,-51.85 84.12,-52.84 85.12,-53.49 86.29,-53.68 86.29,-53.68 86.29,-53.68 87.45,-53.48 88.44,-52.83 89.09,-51.84 89.29,-50.68 89.29,-50.68 89.29,-50.68 89.29,-31.75 89.46,-30.47 90.14,-29.37 91.2,-28.64 92.47,-28.4 92.47,-28.4 92.47,-28.4 94.66,-28.61 95.99,-28.75 97.09,-28.58 98.03,-27.99 98.66,-27.08 98.88,-25.99 98.88,-25.99 98.88,-25.99 98.6,-24.66 97.73,-23.61 96.46,-23.11 96.46,-23.11 94.21,-22.79 92.06,-22.7 92.06,-22.7 88.6,-23.25 85.66,-25.16 83.76,-28.11 83.24,-31.57 83.24,-31.57
  Top Layer region: 119.63,-53.19 117.61,-47.89 120.1,-47.33 120.1,-30.28 117.02,-28.7 116.45,-23.03 120.1,-24.4 120.1,-14.29 120.31,-13.13 120.96,-12.14 121.94,-11.49 123.1,-11.29 123.1,-11.29 123.1,-11.29 124.28,-11.48 125.28,-12.13 125.94,-13.12 126.16,-14.29 126.16,-14.29 126.16,-14.29 126.16,-48.68 125.84,-50.17 124.95,-51.4 123.63,-52.15 123.63,-52.15 123.63,-52.15
"Molex 533980571" [mm] "MOLEX - 53398-0571 - STIFTLEISTE, SMT, 1.25MM, 5POL"
  rect 0.8x1.3 smd: 1(2.5,-1.35) 2(1.25,-1.35) 3(0,-1.35) 4(-1.25,-1.35) 5(-2.5,-1.35)
  rect 2.1x3 smd: 6(5.7,1.35) 7(-5.7,1.35)
  silkscreen extent -5.68,-2.1 5.68,3.1, body extent -5.7,-1.45 5.7,2.75, height 4.7
"Molex 533980771" [mm] "MOLEX - 53398-0771 - STIFTLEISTE, SMT, 1.25MM, 7POL"
  rect 0.8x1.3 smd: 1(3.725,-1.35) 2(2.475,-1.35) 3(1.225,-1.35) 4(-0.025,-1.35) 5(-1.275,-1.35) 6(-2.525,-1.35) 7(-3.725,-1.35)
  rect 2.1x3 smd: 8(6.925,1.35) 9(-6.925,1.35)
  silkscreen extent -6.9,-2.1 6.9,3.1, body extent -6.95,-1.75 6.95,2.45, height 4.7
"Molex 533981271" [mm] "Molex Pico 12Pol Blade SMD gerade 533980871"
  rect 0.8x1.3 smd: 1(6.875,-1.225) 2(5.625,-1.225) 3(4.375,-1.225) 4(3.125,-1.225) 5(1.875,-1.225) 6(0.625,-1.225) 7(-0.625,-1.225) 8(-1.875,-1.225) 9(-3.125,-1.225) 10(-4.375,-1.225) 11(-5.625,-1.225) 12(-6.875,-1.225)
  rect 2x3 smd: 13(9.475,1.225) 14(-9.475,1.225)
  silkscreen extent -10.1,-1.7 10.1,2.5, body extent -10.07,-1.59 10.08,2.61, height 4.7
RESC1608N [mm] "Chip Resistor, Body 1.6x0.8mm, IPC Medium Density"
  rect 0.9x1 smd: 1(-0.85,0) 2(0.85,0)
  silkscreen extent -0.2,-0.4 0.2,0.4, body extent -0.85,-0.48 0.85,0.48, height 0.6
RHL0020A [mm] "QFN, 20-Leads, Body 4.5x3.5mm, Pitch 0.5mm, Thermal Pad 3.05x2.05mm, TI Recommended"
  oval 0.24x0.6 smd: 1(-0.75,2.15) 10(-0.75,-2.15) 11(0.75,-2.15) 20(0.75,2.15)
  oval 0.6x0.24 smd: 2(-1.65,1.75) 3(-1.65,1.25) 4(-1.65,0.75) 5(-1.65,0.25) 6(-1.65,-0.25) 7(-1.65,-0.75) 8(-1.65,-1.25) 9(-1.65,-1.75) 12(1.65,-1.75) 13(1.65,-1.25) 14(1.65,-0.75) 15(1.65,-0.25) 16(1.65,0.25) 17(1.65,0.75) 18(1.65,1.25) 19(1.65,1.75)
  rect 0.3x0.3 smd paste-0.15 mask+0: 21(0,0)
  Top Layer region: 0.16,2.25 0.16,1.925 -0.16,1.925 -0.16,2.25 -0.39,2.25 -0.39,1.525 -1.025,1.525 -1.025,-1.525 -0.39,-1.525 -0.39,-2.25 -0.16,-2.25 -0.16,-1.925 0.16,-1.925 0.16,-2.25 0.39,-2.25 0.39,-1.525 1.025,-1.525 1.025,1.525 0.39,1.525 0.39,2.25
  silkscreen extent -1.98,-2.47 1.98,2.47, body extent -1.82,-2.33 1.83,2.32, height 1.01
Si1132 [mm] "QFN, 2.5x2.5mm, 10polig - für Si1132-Sensor"
  rect 0.8x0.3 smd: 1(-0.95,0.75) 2(-0.95,0.25) 3(-0.95,-0.25) 4(-0.95,-0.75) 6(0.95,-0.75) 7(0.95,-0.25) 8(0.95,0.25) 9(0.95,0.75)
  rect 0.3x0.8 smd: 5(0,-0.95) 10(0,0.95)
  body extent -1.25,-1.25 1.25,1.25, height 0.65
SOT23_N [mm] "SOT23, 3-Leads, Body 2.9x1.3mm, Pitch 0.95mm, Lead Span 2.3mm, IPC Medium Density"
  rect 1.3x0.6 smd: 1(-1.05,0.95) 2(-1.05,-0.95) 3(1.05,0)
  silkscreen extent -1.17,-1.5 0.7,1.93, body extent -0.7,-1.5 0.7,1.5, height 1.1

## Part data
C1 C106: library part "Cap Pol3", "Polarized Capacitor (Surface Mount)"
C2 C3 C4 C5 C6 C100 C101 C102 C103 C104 C105 C107 C108 C109 C110 C111 C112: library part "Kondensator SMD Keramik"
L100: library part Inductor, "Inductor"
Q1 Q2: "N-channel Enhancement Mode Vertical D-MOSFET"
R1 R2 R3 R4 R5 R6 R7 R100 R101 R102 R103 R104 R105: library part "RESC1608 (R0603)", "RESC1608 (R0603)"
ST1: "MOLEX - 53398-0571 - STIFTLEISTE, SMT, 1.25MM, 5POL"
ST2: "Molex Pico 12Pol Blade SMD gerade 533980871"
ST3: "Molex Pico 7Pol Blade SMD gerade 533980771"
U1: "CO2-Sensor; I²C-Interface,"
U2: "UV INDEX AND AMBIENT LIGHT SENSOR IC WITH I2C INTERFACE, QFN 2x2mm"
U3: "Bosch, Druck & Feuchte-Sensor, I2C / SPI"
U100: "Boost Schaltregler, 2,7V - 12 Uin / 4.5V-12.6V Uout / 3A / 1µA Shutdown"

## Free pads (board coordinates)
  round 30 hole 20: 2(2700,50) 2(2700,150) 2(2700,250) 2(2700,350) 2(2700,450) 2(2700,650) 2(2700,750) 2(2700,850) 2(2700,950) 2(2700,1150) 2(2700,1250) 2(2700,1350) 2(2700,1450)
  round 236.22 / inner round 196.85 / far side round 196.85 hole 124.02 mask+3.94: STAND(150,150) STAND(150,1350) STAND(2550,150) STAND(2550,1350) STAND(3300,150) STAND(3300,1350)

## Via types
v1: diameter 30, hole 15, Top Layer to Bottom Layer, 15 vias
v2: diameter 50, hole 28, Top Layer to Bottom Layer, 3 vias

## Nets (pads, with @x,y where several pads share a name; then routed paths per layer and width w, separated by ;. In a path a pad name is that pad's centre, name@x,y a point inside that pad or via, vN(x,y) a via of type N, cw(c..) or ccw(c..) an arc to the next point about the centre after c; other vN are vias at no path point)
6V: C1.1 C2.1 C101.1 C102.1 C103.1 C104.1 R1.2 R2.2 R100.1 U1.1 U100.14 U100.15 U100.16 | length 1972.5
  Top Layer w20: C2.1 1050,400 ; C1.1@1039.45,236.54 R2.2 R1.2 ; C1.1@1050,274.02 1050,400 ; U1.1 1050,400
  Bottom Layer w12: U100.14 U100.15 U100.16
  Bottom Layer w20: U1.1 870,500 800,570 800,647.09 C104.1 C103.1 C101.1 1293.07,810.16 U100.15 ; C102.1 R100.1
A3V: C3.1 C4.1 C5.1 C6.1 Q1.1 Q2.1 R3.2 R4.2 R5.2 ST1.1 ST2.1 U2.3 U2.6 U2.7 U2.9 U3.2 U3.6 U3.8 | length 5356.5
  Top Layer w12: Q2.1 537.4,947.4 590,1000 Q1.1@606.06,1000 ; C5.1 2960,780 2987.2,752.8 U3.6 2987.2,702.8 3012.8,677.2 U3.2 R5.2@3012.8,607.87 ; U2.6 U2.7 ; U2.7@2990.25,862.69 U2.3@2990.25,937.4
  Top Layer w20: ST2.1 50.67,479.33 30,500 30,1040 50,1060 1450,1060 1490,1020 v1(2700,1020) ; Q1.1 607.4,1057.4 ; R4.2@2826.54,924.96 C3.1 ; R4.2 R3.2 ; C5.1 C3.1 ; U2.6@2967.87,860 v1(2940,860) C3.1 ; R5.2 3020.67,549.33 3097.09,472.91 C4.1 ; U2.9@3034.35,860 v1(3060,860) ST1.1@3361.57,860 ; U3.8 C6.1@3081.14,740.35 ; C6.1 3090,857.17
  Bottom Layer w20: v1(2700,1020) 2860,860 v1(2940,860) v1(3060,860)
AGND: ST2.2
CO2_EN: R6.1 R7.1 ST2.6 ST3.1 U100.2 | length 2755.6
  Top Layer w10: ST2.6 225.39,725.39 v1(250,750) R6.1@296.54,750 ; R6.1 R7.1 ; v1(750,910) v1(1650,910) 1650,710 2050,310 ST3.1@2050,170.2
  Bottom Layer w10: v1(250,750) 250,810 350,910 v1(750,910) ; U100.2 1628.9,888.9 v1(1650,910)
CO2_SCL: Q1.2 R6.2 ST2.8 ST3.3 | length 2822.3
  Top Layer w10: ST2.8 R6.2@289.65,823.82 ; R6.2 300,850 350,900 500,900 ; Q1.2@532.6,992.6 500,960 500,900 ; ST3.3@1950,165.08 1950,120 1940,110 650,110 540,220 540,440 440,540 440,740 500,800 500,900
CO2_SDA: Q2.2 R7.2 ST2.7 ST3.2 | length 2630.8
  Top Layer w10: ST2.7@87.17,780 346.54,780 R7.2 420,773.46 420,530 520,430 520,210 640,90 1970,90 1997.44,117.44 ST3.2 ; R7.2@387.87,821.34 Q2.2
GND: C1.2 C2.2 C3.2 C4.2 C5.2 C6.2 C101.2 C102.2 C103.2 C104.2 C106.2 C107.2 C108.2 C109.2 C110.1 C111.1 C112.1 pad.2 R102.2 R103.2 R104.2 R105.2 ST1.2 ST2.9 ST2.10 ST3.4 ST3.5 U1.4 U2.8 U3.1 U3.5 U3.7 U100.20 U100.21 | length 8407.2
  Top Layer w12: U2.8 3009.84,800.16 3012.8,797.2 U3.7 3012.8,707.2 3038.39,681.61 U3.1 C6.2@3081.14,659.65
  Top Layer w20: ST2.9 ST2.10 ; 84.13,900 v2(200,900) ; C2.2 668.5,281.5 700,250 C1.2 854.02,170 1280,170 1350,240 U1.4 1800,500 1900,400 ST3.4@1900,167.83 ; ST3.5 ST3.4 ; C3.2 C5.2 2868.15,740.35 U3.5 ; C4.2@3110,587.09 3110,648.5 C6.2 3140,718.5 v1(3140,740) 3140,770 3179.21,809.21 ST1.2
  Bottom Layer w10: U100.20 1520.47,1003
  Bottom Layer w20: v2(200,900) 200,550 350,400 1270,400 U1.4@1350,480 ; C104.2 C103.2 C101.2 1215.59,618.5 1350,618.5 ; R104.2 1103.46,1003.46 1150,1050 1250,1050 1296.53,1003.47 R103.2 R102.2 1549.02,1003.47 ; U1.4 1350,618.5 ; v1@1549.02,871.18 1549.02,1003.47 ; v1(1550,769.81) 1550,618.5 ; C111.1@1698.03,1003.47 1549.02,1003.47 ; v1(3140,740) v1(2930,740) 2850,740 2800.91,690.91 2800.91,500.91 2750,450 2594.02,450 C106.2 2431.11,612.91 C107.2 C109.2 2084.41,618.5 C110.1 C112.1 1550,618.5 ; 1350,618.5 1550,618.5
  other v1: 1519.49,820 1580.51,820 1550,870.2
LIGHT_IRQ: R4.1 ST1.3 ST2.3 U2.4 | length 4544.6
  Top Layer w10: ST2.3 282.24,577.76 460,400 460,180 610,30 2220,30 v1(2700,510) ; R4.1@2896.06,937.4 v1(2940,937.4) U2.4 ; v1(3240,760) ST1.3
  Bottom Layer w10: v1(2700,510) 2770,580 2770,720 2830,780 3150,780 3170,760 v1(3240,760) 3240,860 3162.6,937.4 v1(2940,937.4)
LPHT_SCL: R3.1 ST1.5 ST2.5 U2.2 U3.4 | length 5147.2
  Top Layer w10: ST2.5 243.82,676.18 500,420 500,200 630,70 2180,70 2770,660 ; R3.1 2893.46,1066.54 ; U3.4 2770.35,659.65 2770.35,1030.35 2810,1070 3360,1070 3430,1000 3430,690 3401.57,661.57 ST1.5 ; U2.2 3009.84,1069.84
LPHT_SDA: R5.1 ST1.4 ST2.4 U2.1 U3.3 | length 5122.6
  Top Layer w10: ST2.4 263.03,626.97 480,410 480,190 620,50 2200,50 2750,600 R5.1 2987.2,600 ; U3.3 2987.2,600 ; U2.1 3029.53,1019.53 3060,1050 3357.51,1050 3414.09,993.41 3414.09,724.09 3400.79,710.79 ST1.4 3240.79,710.79 3180,650 3180,450 3150,420 3090,420 2987.2,522.8 2987.2,600
NetC100_1: C100.1 L100.2 R101.2 U100.4 U100.5 U100.6 U100.7 | length 1049.5
  Bottom Layer w10: U100.7 U100.6 U100.5 U100.4
  Bottom Layer w20: U100.6 1999.84,810.16 2000,810 2095.67,905.67 L100.2 1783.46,1000 R101.2 ; C100.1 1831.5,808.66
NetC100_2: C100.2 U100.8 | length 162.2
  Bottom Layer w10: U100.8 1679.21,770.79 1700,750 C100.2
NetC105_1: C105.1 R103.1 | length 126.9
  Bottom Layer w10: C105.1 1264.96,936.54 R103.1
NetC105_2: C105.2 U100.18 | length 313.7
  Bottom Layer w10: C105.2 1238.5,900 1400,900 1430.79,869.21 U100.18
NetC111_2: C111.2 U100.1 | length 149.1
  Bottom Layer w10: U100.1 1579.53,929.53 1588.51,938.51 C111.2
NetC112_2: C112.2 U100.10 | length 70.6
  Bottom Layer w10: U100.10 1579.53,721.97 C112.2
NetQ1_3: Q1.3 R1.1 U1.3 | length 1189.8
  Top Layer w10: Q1.3 570,830 700,700 1200,700 1250,650 U1.3 R1.1
NetQ2_3: Q2.3 R2.1 U1.2 | length 1026.6
  Top Layer w10: Q2.3 500,700 550,650 1100,650 1150,600 U1.2 R2.1
NetR100_2: R100.2 R104.1 U100.17 | length 444.2
  Bottom Layer w10: R100.2 R104.1 ; R100.2@1113.94,849.53 U100.17
NetR101_1: R101.1 U100.3 | length 214.3
  Bottom Layer w10: U100.3 1749.21,869.21 1780,900 R101.1
NetR102_1: R102.1 U100.19 | length 104.8
  Bottom Layer w10: R102.1 1447.64,888.9 U100.19
NetR105_1: R105.1 U100.13 | length 154.3
  Bottom Layer w10: R105.1 1400,740 1430,770 1484.26,770 U100.13
UBAT: C106.1 C107.1 C108.1 C109.1 C110.2 L100.1 ST2.11 ST2.12 ST3.6 ST3.7 U100.9 | length 6229.4
  Top Layer w20: ST2.11 81.77,1000 v2(200,1000) ; ST3.7 ST3.6 1800,167.44 v2(1800,250)
  Bottom Layer w10: U100.9 1668.9,751.1 1700,720 C110.2
  Bottom Layer w20: C110.2 2031.5,681.5 C109.1@2077.09,727.09 ; v2(1800,250) 350,250 100,500 100,900 v2(200,1000) 400,1200 2100,1200 L100.1@2300,1000 ; C109.1 C107.1 2431.1,727.09 C106.1 2500,950 2450,1000 L100.1
pads on no net: ST1.6 ST1.7 ST2.13 ST2.14 ST3.8 ST3.9 U1.5 U1.6 U1.7 U1.8 U1.9 U1.10 U1.11 U1.12 U2.5 U2.10 U100.11 U100.12

## Polygon pours and split planes (outlines as drawn)
6V on Bottom Layer "Bottom Layer-No Net" (solid, pour order 12): 1485.04,829.84 1050.16,829.84 1050,830 1000,780 850,780 750,680 750,570 750,560 850,460 1030,460 1030,540 850,540 820,570 820,650 870,700 1250,700 1340,790 1484.57,790 1485.04,790.47 1485.04,829.84
UBAT on Bottom Layer "Bottom Layer-No Net" (solid, pour order 6): 2250,1050 2550,1050 2550,700 2080,700 2050,670 2000,670 2000,710 2190,900 2230,900 2250,920 2250,1050
NetC100_1 on Bottom Layer "Bottom Layer-No Net" (solid, pour order 4): 1614.96,849.53 1615.44,850 1900,850 2000,950 2000,1050 2150,1050 2150,900 2010,760 1820,760 1790,790 1615.44,790 1614.96,790.47
GND on Bottom Layer "Bottom Layer-No Net" (solid, remove dead copper, pour order 18): 0,0 0,1496.06 3444.88,1496.06 3444.88,0 0,0
GND on Top Layer "Bottom Layer-No Net" (solid, remove dead copper, pour order 16): 0,0 0,1496.06 3444.88,1496.06 3444.88,0 0,0

## Other copper
Top Layer:
  text "EIS Sensoren V1.0" at 460,1380 h60
  text "A.Kern 30.7.2015" at 460,1300 h60
Bottom Layer:
  region net 6V: 1485.04,829.84 1049.84,829.84 1000,780 850,780 750,680 750,560 850,460 1030,460 1030,540 852.93,540 820,572.93 820,650 870,700 1250,700 1340,790 1484.57,790 1485.04,790.47

## Silkscreen, mask and mechanical layers (free items; w line width, h text height)
Mechanical 1:
  lines w10: 0,0 3450,0 3450,1500 0,1500 0,0